# Altium PCB PCB.PcbDoc
Units mil, origin at the board's own origin, x right, y up, seen from the top; angles counter-clockwise.
Board outline 1540 x 2330 mil, 2 copper layers (Top Layer, Bottom Layer); 12 components, 9 nets, 38 pads, 0 vias.
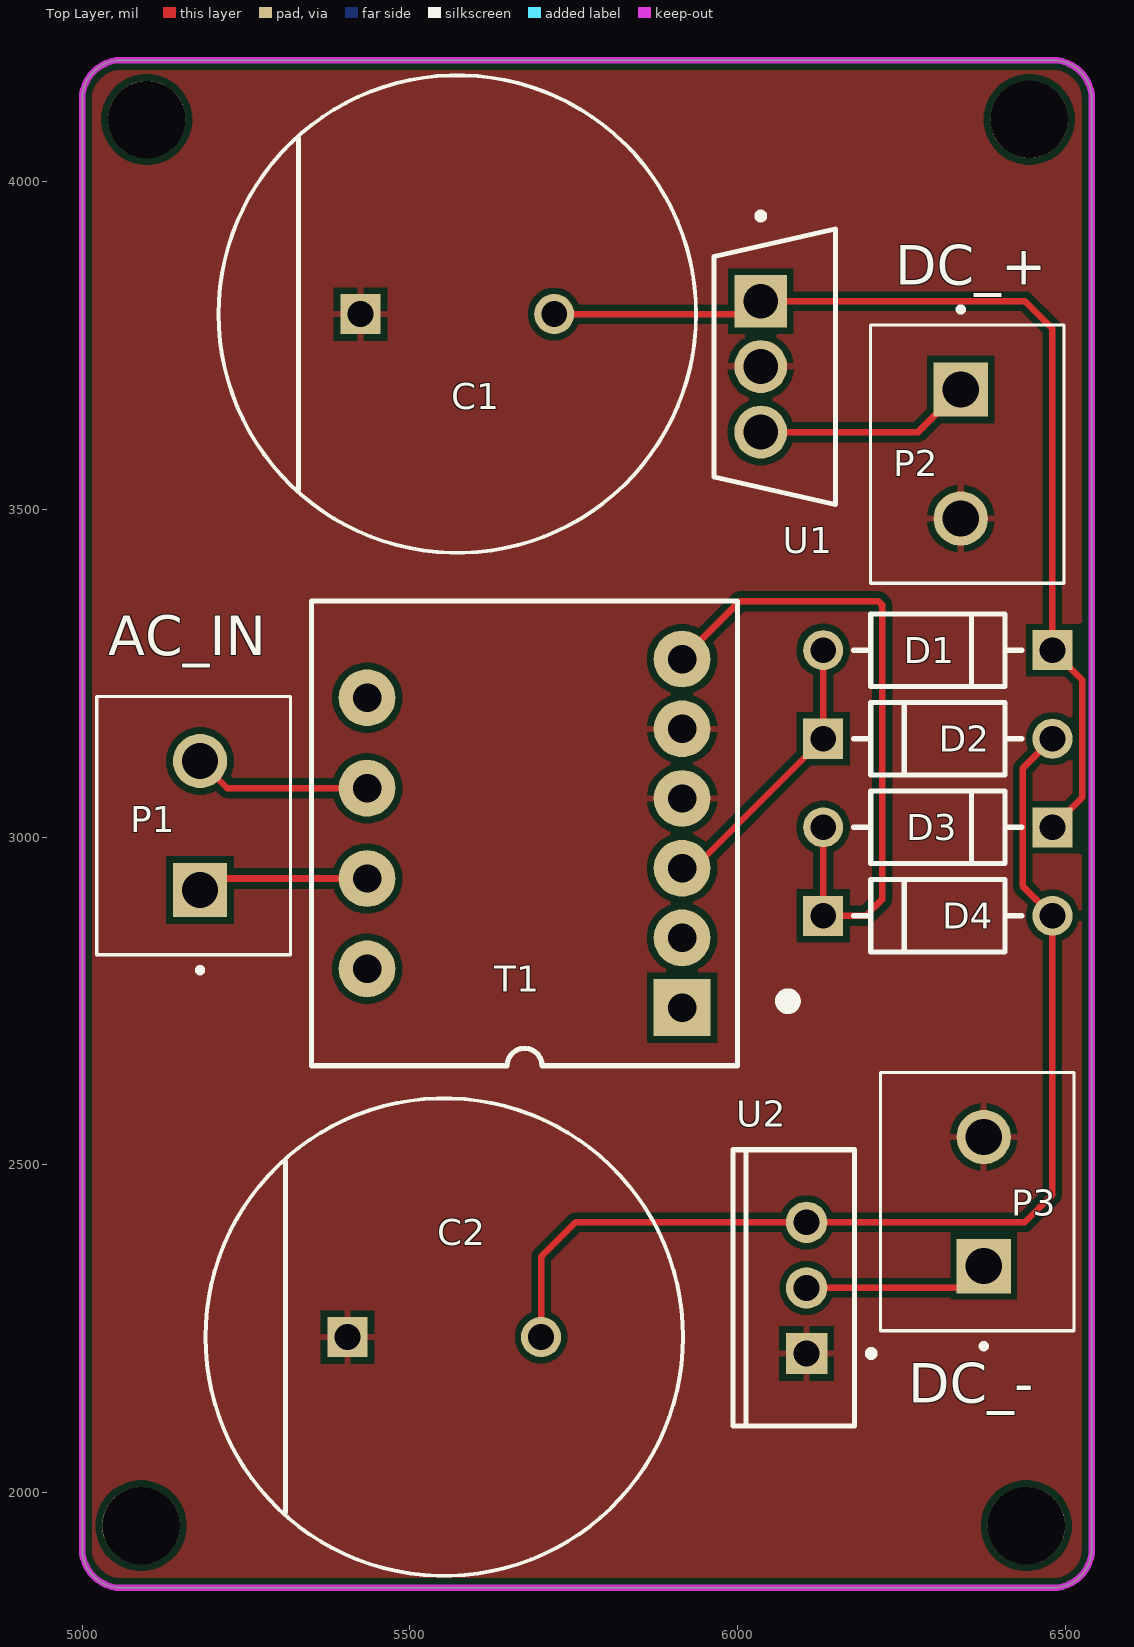
[diagram p0: Top Layer view]
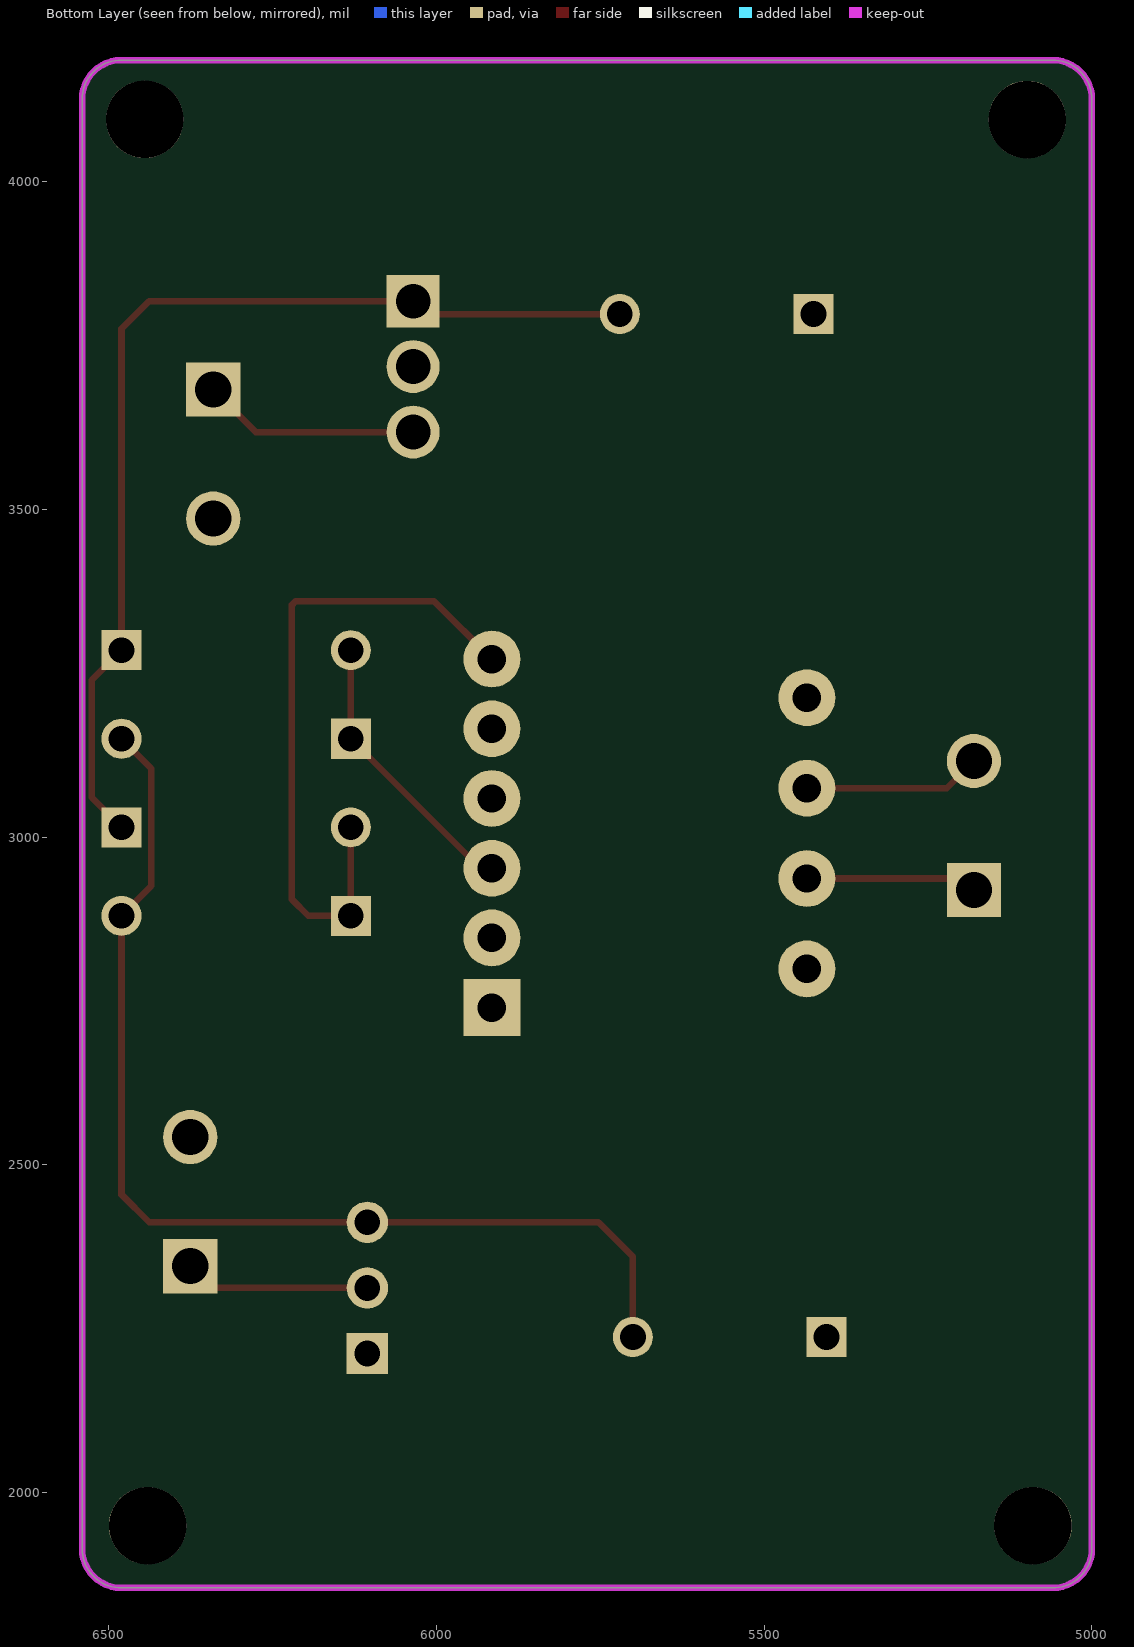
[diagram p1: Bottom Layer view, seen from below]
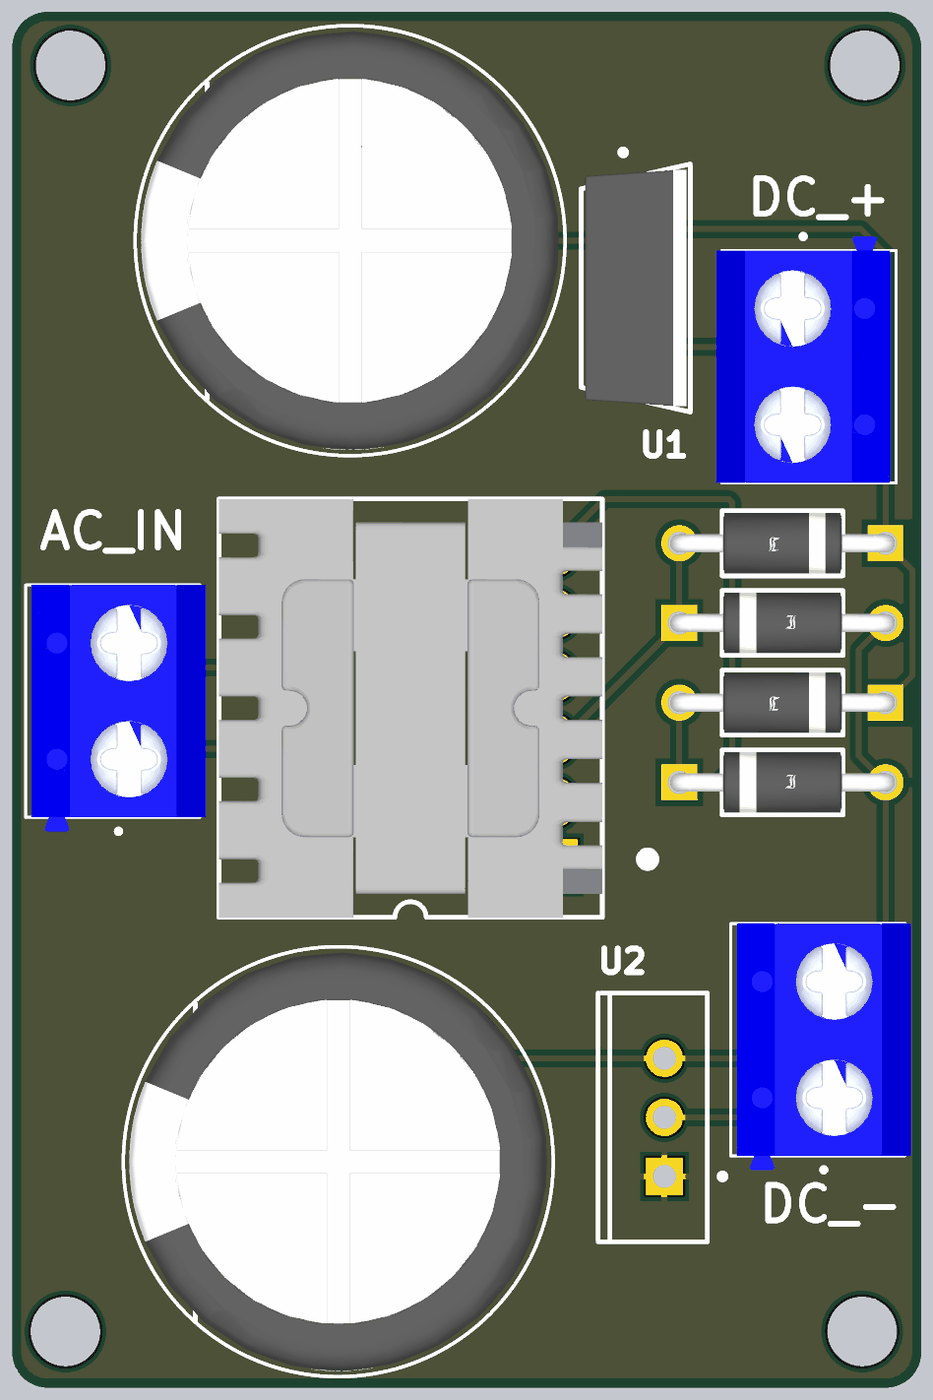
[diagram p2: 3D render of the assembled board from above, using the file's embedded part models]

## Layer stack, top to bottom
Top Solder: solder mask 0.4, Solder Resist, Dk 3.5
Top Layer: signal copper 1.4
Dielectric 1: dielectric 12.6, FR-4, Dk 4.8
Bottom Layer: signal copper 1.4
Bottom Solder: solder mask 0.4, Solder Resist, Dk 3.5

## Board outline
5000,1915 5000,4125 cw(c5060,4125) 5060,4185 6480,4185 cw(c6480,4125) 6540,4125 6540,1915 cw(c6480,1915) 6480,1855 5060,1855 cw(c5060,1915)

## Design rules (kind name [scope] priority, off if disabled: settings)
Clearance Clearance_1 [OnMid vs OnMid] p1: gap=10 ignorepadtopadclearanceinfootprint=FALSE sourcerule=38 cellrowname=All cellrowtype=0 cellcolname=All cellcoltype=0 innerlayers=TRUE
Clearance Clearance_2 [(ExistsOnLayer('Top Layer') Or ExistsOnLayer('Bottom Layer')) vs (ExistsOnLayer('Top Layer') Or ExistsOnLayer('Bottom Layer'))] p2: gap=10 ignorepadtopadclearanceinfootprint=FALSE sourcerule=38 cellrowname=All cellrowtype=0 cellcolname=All cellcoltype=0 outerlayers=TRUE
Clearance [All] p3: gap=10 ignorepadtopadclearanceinfootprint=FALSE ismatrix=TRUE
HoleSize MaxMinHoleSize_1 [All] p1: absolutevalues=TRUE maxlimit=275.59 minlimit=1 maxpercent=80.000 minpercent=20.000
HoleSize [All] p2: absolutevalues=TRUE maxlimit=100 minlimit=1 maxpercent=80.000 minpercent=20.000
PolygonConnect [All] p1: connectstyle=Relief reliefconductorwidth=10 reliefentries=4 polygonreliefangle="90 Angle" airgapwidth=10
RoutingVias [All] p1: holewidth=28 width=50 viastyle="Through Hole" minholewidth=28 minwidth=50 maxholewidth=28 maxwidth=50
SolderMaskExpansion [All] p1: expansion=4 istentingtop=FALSE
SupplyNets "Schematic Supply Nets" [InNet('GND')] p1: voltage=0.000
Width [All] p1: maxlimit=10 minlimit=10 preferedwidth=10
29 further rules are at their usual default settings.

## Components (designator, comment, footprint, x,y, rotation, side; value= is the part's Value field where it differs from the comment)
C1 "EEUFC1E472" FP-RAD-TH-D_18_0_5-L_35_5-MFG 5572.36,3797.6 r0 top value=4.7mF
C2 "EEUFC1E472" FP-RAD-TH-D_18_0_5-L_35_5-MFG 5552.36,2237.6 r0 top value=4.7mF
D1 "1N4007" FP-1N4007-MFG 6305,3285 r180 top value=15pF
D2 "1N4007" FP-1N4007-MFG 6305,3150 r0 top value=15pF
D3 "1N4007" FP-1N4007-MFG 6305,3015 r180 top value=15pF
D4 "1N4007" FP-1N4007-MFG 6305,2880 r0 top value=15pF
P1 "AC-input" HANDSON_KF301-2P 5180,3017.6 r90 top
P2 "AC-input" HANDSON_KF301-2P 6340,3584.17 r270 top
P3 "AC-input" HANDSON_KF301-2P 6375,2444.17 r90 top
T1 "7491182012" "EE16_7_4 (E16)" 5674.84,3005.75 r180 top
U1 "LM7812CT" FP-TO220B03-MFG 6056.26,3717.4 r0 top
U2 "LM7912CT/NOPB" NDE0003A 6105,2312.6 r90 top

## Footprints (in the part's own frame and the unit in brackets; to place one, negate y for a bottom-side part, rotate by r counter-clockwise, add the part's x,y. Pads: shape width x height; smd on the part's side, far side on the other; paste and mask are expansions set on the pad)
"EE16_7_4 (E16)" [mm] "THT, 10-Leads, Body 18x16.5mm (max), Pitch 2.7mm"
  rect 2.2x2.2 hole 1.1: 1(-6.1,6.75)
  round 2.2 hole 1.1: 2(-6.1,4.05) 3(-6.1,1.35) 4(-6.1,-1.35) 5(-6.1,-4.05) 6(-6.1,-6.75) 7(6.1,-5.25) 8(6.1,-1.75) 9(6.1,1.75) 10(6.1,5.25)
  silkscreen extent -10.4,-9 8.25,9, body extent -8.25,-9 8.25,9, height 18.2
FP-1N4007-MFG [mm]
  rect 1.55x1.55 hole 1 paste-2539.97 mask+0: 1(-4.44,0)
  round 1.55 hole 1 paste-2539.97 mask+0: 2(4.44,0)
  silkscreen extent -3.26,-1.4 3.26,1.4, body extent -5.32,-1.5 5.32,1.5, height 0.25
FP-RAD-TH-D_18_0_5-L_35_5-MFG [mm]
  rect 1.55x1.55 hole 1 paste-2539.97 mask+0: 1(-3.75,0)
  round 1.55 hole 1 paste-2539.97 mask+0: 2(3.75,0)
  silkscreen extent -9.25,-9.25 9.25,9.25, body extent -9.35,-9.35 9.35,9.35, height 0.25
FP-TO220B03-MFG [mm]
  rect 2.05x2.05 hole 1.35 paste-2539.97 mask+0: 1(-0.54,2.535)
  round 2.05 hole 1.35 paste-2539.97 mask+0: 2(-0.54,0) 3(-0.54,-2.535)
  silkscreen extent -2.35,-5.34 2.35,5.96, body extent -2.45,-5.44 2.45,5.44, height 0.25
HANDSON_KF301-2P [mm]
  rect 2.1x2.1 / inner round 2.1 / far side rect 2.1x2.1 hole 1.4: 1(-2.5,0)
  round 2.1 hole 1.4: 2(2.5,0)
  silkscreen extent -5.7,-3.5 5,4, body extent -5.6,-3.75 5,3.75, height 10
NDE0003A [mm] "FM, 3-Leads, Body 10.7x4.7mm, Pitch 2.54mm"
  rect 1.6x1.6 hole 1: 1(-2.54,0)
  round 1.6 hole 1: 2(0,0) 3(2.54,0)
  silkscreen extent -5.35,-2.63 5.35,2.85, body extent -5.4,-1.9 5.4,2.9, height 19.4

## Part data
C1 C2: library part CMP-05427-001130-1, "Aluminum Electrolytic Capacitors (Radial Lead Type) AEC-Q200 Qualified 4700uF ±20% 25V", Capacitance=4.7mF, Case/Package=Radial, Dielectric Material=Aluminium, ESR (Equivalent Series Resistance)=15mR, Leakage Current=3uA, Max Operating Temperature=105°C, Min Operating Temperature=-55°C, Package Quantity=50, Ripple Current=3.68A, Tolerance=20%, Voltage=25V, Construction=RADIAL, Contact Plating=Tin, Diameter=18mm, Features="General Purpose", Height=35.5mm, Height - Seated (Max)=1.398inch, Impedance=15mR, Lead Diameter=0.8mm, Lead Free="Lead Free", Lead Pitch=7.5mm, Length=35mm, Life (Hours)=5000Hour, Mount="Through Hole", Number of Pins=2, Packaging=Bulk, Radiation Hardening=No, REACH SVHC="No SVHC", Ripple Current (AC)=3.68A, RoHS Compliant=Yes, Series=FC, Termination=Radial, Voltage Rating=25V, Voltage Rating (DC)=25V
D1 D2 D3 D4: library part CMP-123542-000001-1, "Rectifier diode 1000 V 1 A DO-41, ,", Capacitance=15pF, Forward Current=1A, Manufacturer=Diotec, Max Junction Temp=+175°C, Max Repetitive Reverse Voltage=1000V, Max Surge Forward Current=27A, Peak Reverse Current=5uA, Temperature="-50°C to +175°C", Temperature Range Low=-50°C, Automotive=No, Category=Diode, ComponentLink2Description=Datasheet, ComponentLink2URL=https://datasheet.octopart.com/1N4007-Diotec-datasheet-62346875.pdf, Device Class L1="Discrete Semiconductors", Device Class L2=Diodes, Device Class L3="Rectifier Diodes", Height=2.8mm, Ipc Land Pattern Name=DIOAD888W100L520D280, Lead Free=Yes, Manufacturer Part Number=1N4007, Octopart=https://octopart.com/1n4007-diotec-4040411, Package=1N4007, Reverse Voltage=1000V, RoHS=TRUE, Temperature Range High=+175°C
P1 P2 P3: library part KF301-2P, "2 Pin Terminal Block 5mm Pitch", Package=None, Check_prices=https://www.snapeda.com/parts/KF301-2P/Handson+Technology/view-part/?ref=eda, MF="Handson Technology", MP=KF301-2P, SnapEDA_Link=https://www.snapeda.com/parts/KF301-2P/Handson+Technology/view-part/?ref=snap
T1: library part CMP-1471-00001-1, "Off-Line Transformer WE-UNIT , L=0.9mH", Inductance=0.9mH, Input Voltage (AC)=85-265, Manufacturer="Wuerth Elektronik", Output Current (A)=0.6, Output Voltage (DC)=12, ComponentLink1Description="Manufacturer URL", ComponentLink1URL=http://www.we-online.com, ComponentLink2Description=Datasheet, ComponentLink2URL=http://www.we-online.de/katalog/media/pdf/7491182012.pdf, PackageReference="EE16_7_4 (E16)", PartNumber=7491182012, Turns Ratio="\"9.5\",\"1:1\""
U1: library part CMP-07128-000015-1, "IC REG LINEAR 12V 1A TO220-3", Dropout Voltage=2V, Manufacturer="ON Semiconductor", Max Supply Voltage=35V, Nominal Supply Current=5.1mA, Output Current=1A, Output Voltage=12V, Package=TO220B03, Temperature="-40°C to +125°C", Temperature Range High=+125°C, Temperature Range Low=-40°C, Accuracy Percentage=4%, Automotive=No, Category=IC, ComponentLink2Description=Datasheet, ComponentLink2URL=https://www.mouser.in/datasheet/2/308/LM7812-1125088.pdf, Device Class L1="Integrated Circuits (ICs)", Device Class L2="Power Management ICs", Device Class L3="Voltage Regulators - Linear", Digikey Description="IC REG LINEAR 12V 1A TO220-3", Height=20.4mm, Ipc Land Pattern Name=TO-220, Lead Free=Yes, Manufacturer Part Number=LM7812CT, Number Of Outputs=1, Obsolete Part=true, Octopart=https://octopart.com/lm7812ct-on+semiconductor-14383031, Output Type=Fixed, RoHS=TRUE, Standoff Height=2.7mm
U2: library part CMP-0062-02473-3, "3-Terminal Negative Regulator, 3-pin TO-220, Pb-Free", Manufacturer="Texas Instruments", PackageTopMarking=NSUZXYTTE#*LM7912CT, PowerWise=N, ComponentLink1Description="Datasheet URL", ComponentLink1URL=http://www.ti.com/general/docs/lit/getliterature.tsp?genericPartNumber=LM7912&fileType=pdf, CompType="LDO IC", PackageDescription="TO-220, Molded, 3 Lead, Straight", PackageReference=NDE0003A, PinCount=3, RoHS=Y

## Free pads (board coordinates)
  round 118.11 hole 118.11 unplated: 4(5090,1950) 4(5098.66,4094.26) 4(6440,1950) 4(6444.47,4094.49)

## Nets (pads, with @x,y where several pads share a name; then routed paths per layer and width w, separated by ;. In a path a pad name is that pad's centre, name@x,y a point inside that pad or via, vN(x,y) a via of type N, cw(c..) or ccw(c..) an arc to the next point about the centre after c; other vN are vias at no path point)
GND: C1.1 C2.1 P2.2 P3.2 T1.4 T1.5 U1.2 U2.1
NetC1_2: C1.2 D1.1 D3.1 U1.1 | length 1583.2
  Top Layer w10: C1.2 6015.39,3797.6 U1.1 6437.8,3817.2 6479.8,3775.2 D1.1 6525.31,3239.49 6525.31,3060.51 D3.1
NetC2_2: C2.2 D2.2 D4.2 U2.3 | length 1674.4
  Top Layer w10: C2.2 5700,2360 5752.6,2412.6 U2.3 6437.6,2412.6 6479.8,2454.8 D4.2 6434.29,2925.51 6434.29,3104.49 D2.2
NetD1_2: D1.2 D2.1 T1.3 | length 432
  Top Layer w10: T1.3 5932.8,2952.6 D2.1 D1.2
NetD3_2: D3.2 D4.1 T1.6 | length 1028.4
  Top Layer w10: T1.6 6003.5,3360 6214.14,3360 6220,3354.14 6220,2905 6195,2880 D4.1 D3.2
NetP1_1: P1.1 T1.9 | length 262
  Top Layer w10: P1.1 5197.68,2936.85 T1.9
NetP1_2: P1.2 T1.8 | length 271.8
  Top Layer w10: P1.2 5221.38,3074.65 T1.8
NetP2_1: P2.1 U1.3 | length 331.9
  Top Layer w10: U1.3 6275,3617.6 P2.1
NetP3_1: P3.1 U2.2 | length 283.7
  Top Layer w10: U2.2 6341.85,2312.6 P3.1
pads on no net: T1.1 T1.2 T1.7 T1.10

## Polygon pours and split planes (outlines as drawn)
GND on Top Layer "GND_L01_P000" (solid, pour order 0): 5000,1915 5000,4125 cw(c5060,4125) 5060,4185 6480,4185 cw(c6480,4125) 6540,4125 6540,1915 cw(c6480,1915) 6480,1855 5060,1855 cw(c5060,1915)

## Keep-outs
Keep-Out Layer:
  the board outline again, w10

## Silkscreen, mask and mechanical layers (free items; w line width, h text height)
Top Overlay:
  text "DC_+" at 6240,3842.6 h60
  text "AC_IN" at 5040,3277.6 h60
  text "DC_-" at 6260,2137.6 h60